# EAGLE board BreadboardPower (EAGLE 9.7.0)
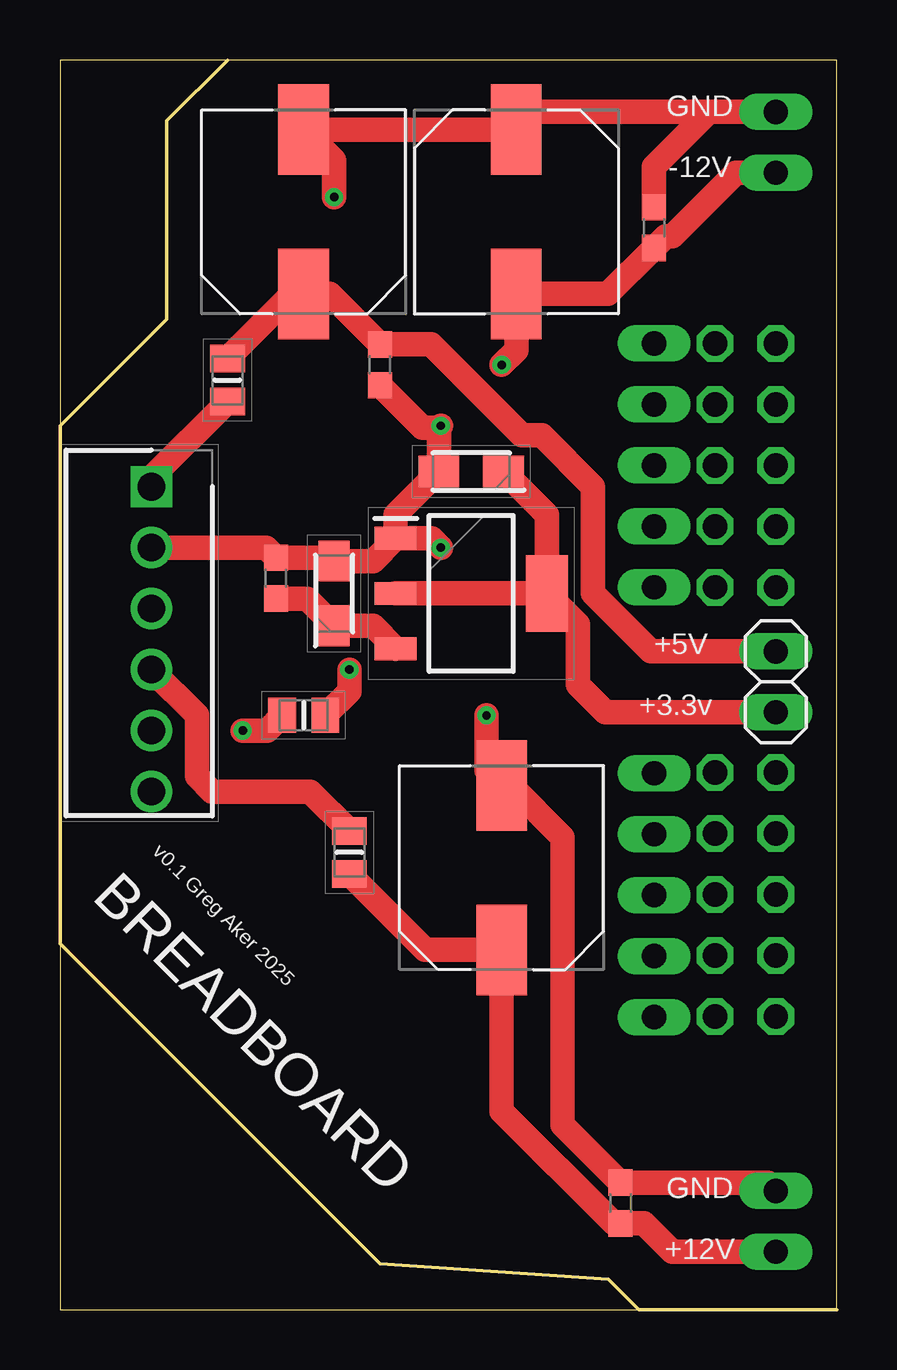
[diagram p0: board, top side]
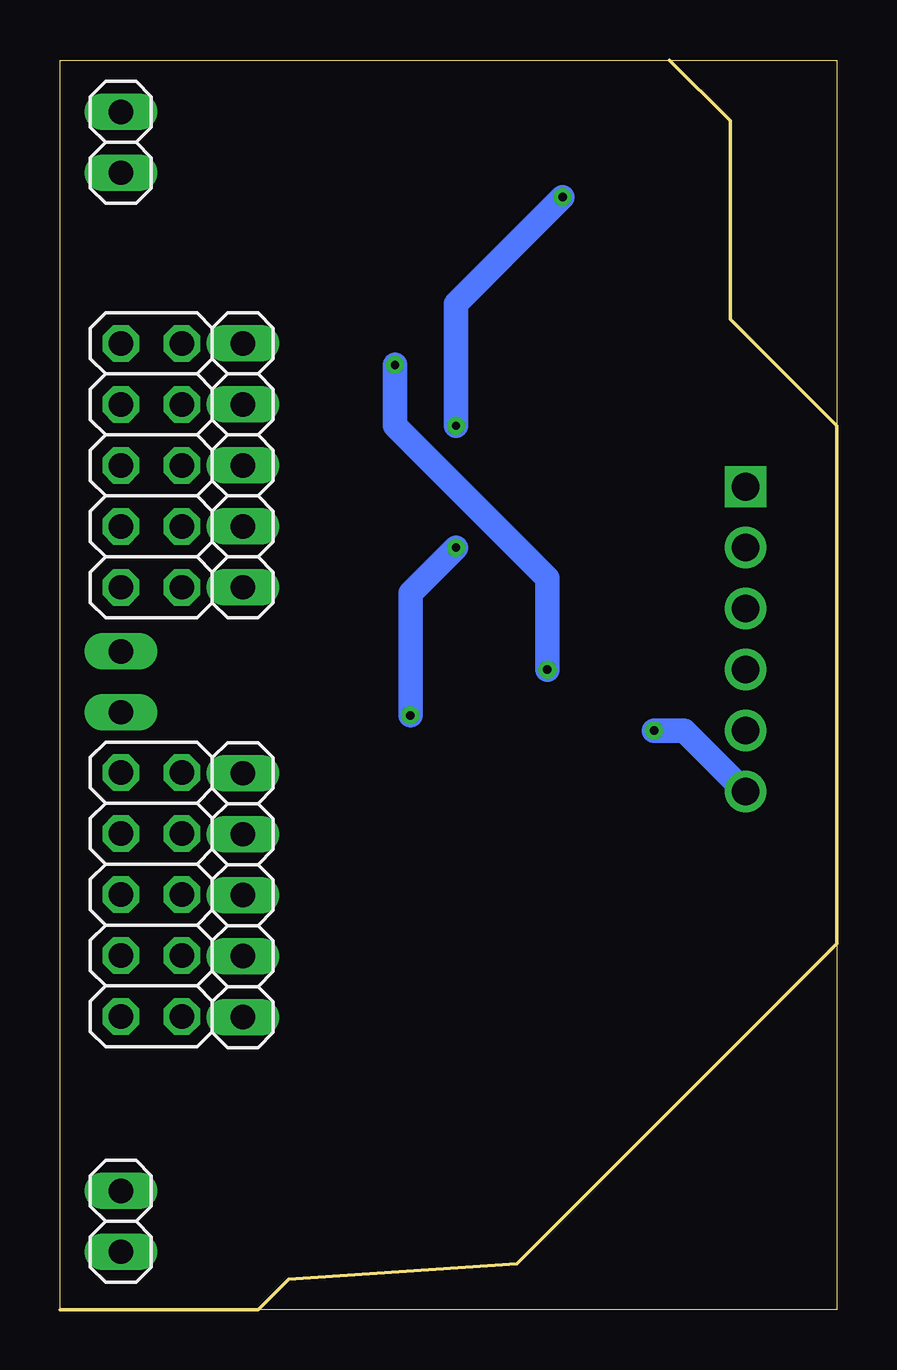
[diagram p1: board, bottom side, seen from below]

Size 32.38 x 52.07 mm. Coordinates in mm from the lower left corner, seen from the top.
Outline: 24.13,0 0,0 0,19.05
Outline: 24.13,0 32.38,0
Outline: 32.38,0 32.38,52.07 6.99,52.07
Outline: 6.99,52.07 0,52.07 0,36.83
Outline: 0,36.83 0,19.05
Outline: 6.99,52.07 4.45,49.53 4.45,45.09 4.45,41.27 0,36.83
Outline: 0,36.83 0,19.05
Outline: 0,19.05 0,15.24 13.34,1.91 22.86,1.27 24.13,0
Outline: 24.13,0 32.38,0
Copper layers (1*16): Top 0.035mm / dielectric 1.5mm / Bottom 0.035mm
Design rules "Fusion Electronics Design Rules": minimum track width 6mil, minimum drill 0.35mm, track to track 6mil, track to pad 6mil, pad to pad 6mil, via to via 6mil, smd to smd 6mil, copper to edge 40mil, drill to drill 6mil, minimum pad ring 10mil, minimum via ring 8mil, stop-mask expansion 4mil, vias tented up to drill 9999mil, thermal gap 10mil

## Footprints (pad centres in the part's own frame; a part is rotated, then mirrored left to right if it is on the bottom)
CAPAE830X1050N = smd 3.764 x 2.115: 1 -3.426,0; 2 3.426,0
0603 = smd 1.1 x 1: 1 -0.85,0; 2 0.85,0
CAPPM3216X180N = smd 1.7 x 1.3: 1 -1.35,0; 2 1.35,0
BEADC2012X105N = smd 1.15 x 1.45: 1 -0.9,0; 2 0.9,0
SOT230P700X180-4N = smd 1.75 x 0.95: 1 -3.15,2.3; 2 -3.15,0; 3 -3.15,-2.3 | smd 1.75 x 3.2: 4 3.15,0
SHDR6W66P0X254_1X6_1524X572X10 = drill 1.15 pad 1.725 square: 1 0,0 | drill 1.15 pad 1.725: 2 -2.54,0; 3 -5.08,0; 4 -7.62,0; 5 -10.16,0; 6 -12.7,0
1X02 = drill 1.016 long: 1 -1.27,0; 2 1.27,0
1X05 = drill 1.016 long: 1 -5.08,0; 2 -2.54,0; 3 0,0; 4 2.54,0; 5 5.08,0
2X05 = drill 1.016 octagon: 1 -5.08,-1.27; 2 -5.08,1.27; 3 -2.54,-1.27; 4 -2.54,1.27; 5 0,-1.27; 6 0,1.27; 7 2.54,-1.27; 8 2.54,1.27; 9 5.08,-1.27; 10 5.08,1.27

## Placement (x,y rotation side)
C1  220uf  [CAPAE830X1050N]  19.02,45.75 270 top
C2  220uf  [CAPAE830X1050N]  18.41,18.41 90 top
C3  0.1uF  [0603]  24.77,45.09 270 top
C4  0.1uF  [0603]  23.37,4.45 270 top
C5  0.1uF  [0603]  13.34,39.37 90 top
C6  220uf  [CAPAE830X1050N]  10.16,45.75 90 top
C9  TAJA106K016RNJ  [CAPPM3216X180N]  17.14,34.92 180 top
C10  TAJA106K016RNJ  [CAPPM3216X180N]  11.43,29.84 90 top
C11  0.1uF  [0603]  9.01,30.48 90 top
FB1  BLM21PG300SN1D  [BEADC2012X105N]  10.16,24.77 0 top
FB2  BLM21PG300SN1D  [BEADC2012X105N]  12.06,19.05 270 top
FB3  BLM21PG300SN1D  [BEADC2012X105N]  6.99,38.73 90 top
IC2  LM1117MPX-3.3_NOPB  [SOT230P700X180-4N]  17.14,29.84 0 top
J1  640456-6  [SHDR6W66P0X254_1X6_1524X572X10]  3.81,34.29 90 top
JP1  PINHD-1X2  [1X02]  29.84,48.64 90 bottom
JP2  PINHD-1X2  [1X02]  29.84,3.68 90 bottom
JP3  PINHD-1X5  [1X05]  24.77,35.18 270 bottom
JP4  PINHD-1X5  [1X05]  24.77,17.27 270 bottom
JP5  PINHD-1X2  [1X02]  29.84,26.16 270 top
JP6  PINHD-2X5  [2X05]  28.57,17.3 90 bottom
JP7  PINHD-2X5  [2X05]  28.57,35.18 270 bottom

## Library data of the parts
C1 C2 C6 = Tinkercad; CATEGORY: Capacitor
C3-C5 C11 = SparkFun-Capacitors; PROD_ID: CAP-08390
C9 C10 = TAJA106K016RNJ; DESCRIPTION: AVX - TAJA106K016RNJ - CAP, TANT, 10UF, 16V, CASE A; HEIGHT: 1.8mm; MANUFACTURER_NAME: Kyocera AVX; MANUFACTURER_PART_NUMBER: TAJA106K016RNJ; MOUSER_PART_NUMBER: 581-TAJA106K016R; MOUSER_PRICE-STOCK: https://www.mouser.co.uk/ProductDetail/KYOCERA-AVX/TAJA106K016RNJ?qs=OVpPYgiJXXV05Cvf2fCYWQ%3D%3D
FB1-FB3 = BLM21PG300SN1D; DESCRIPTION: 30 Ohms @ 100MHz 1 Power Line Ferrite Bead 0805 (2012 Metric) 4A 14mOhm; HEIGHT: 1.05mm; MANUFACTURER_NAME: Murata Electronics; MANUFACTURER_PART_NUMBER: BLM21PG300SN1D; MOUSER_PART_NUMBER: 81-BLM21P300S; MOUSER_PRICE-STOCK: https://www.mouser.co.uk/ProductDetail/Murata-Electronics/BLM21PG300SN1D?qs=vSIcEeo8lXttJMV%2F1g5%2F6A%3D%3D
IC2 = LM1117MPX-3.3_NOPB; DESCRIPTION: Space saving 800-mA low-dropout linear regulator with internal current limit; HEIGHT: 1.8mm; MANUFACTURER_NAME: Texas Instruments; MANUFACTURER_PART_NUMBER: LM1117MPX-3.3/NOPB; MOUSER_PART_NUMBER: 926-LM1117MPX3.3NOPB; MOUSER_PRICE-STOCK: https://www.mouser.co.uk/ProductDetail/Texas-Instruments/LM1117MPX-3.3-NOPB?qs=X1J7HmVL2ZHRbBIxXi4utg%3D%3D
J1 = 640456-6; DESCRIPTION: Body Features: Primary Product Color Natural | Configuration Features: Number of Rows 1 | Number of Columns 6 | PCB Mount Orientation Vertical | Number of Positions 6 | Contact Features: Contact Underplating Material Thickness 50 MICIN | Contact Underplating Material Thickness 1.27 MICM | Mating Square Post Dimension .64 MM | Contact Layout Inline | Contact Mating Area Length .295 INCH | Contact Mating Area Plating Material Thickness 3.81 MICM | Contact Base Material Copper Alloy | Contact Mating Area Plati; HEIGHT: 10.033mm; MANUFACTURER_NAME: TE Connectivity; MANUFACTURER_PART_NUMBER: 640456-6; MOUSER_PART_NUMBER: 571-6404566; MOUSER_PRICE-STOCK: https://www.mouser.co.uk/ProductDetail/TE-Connectivity-AMP/640456-6?qs=%2F35zJ5USjomb%252BGgX%252BBnrrQ%3D%3D
JP1 JP2 JP5 = Connector; CATEGORY: Headers; DESCRIPTION: Header-Straight-2 Position; PACKAGE_TYPE: THT; PITCH: 0.100" (2.54mm); SUBCATEGORY: Headers-Male Pins; TYPE: Board to Board or Cable-Unshrouded-Through Hole-Straight
JP3 JP4 = Connector; CATEGORY: Headers; DESCRIPTION: Header-Straight-5 Position; PACKAGE_TYPE: THT; PITCH: 0.100" (2.54mm); SUBCATEGORY: Headers-Male Pins; TYPE: Board to Board or Cable-Unshrouded-Through Hole-Straight
JP6 JP7 = Connector; CATEGORY: Headers; DESCRIPTION: Header-Straight-2x5 Position; PACKAGE_TYPE: THT; PITCH: 0.100" (2.54mm); SUBCATEGORY: Headers-Male Pins; TYPE: Board to Board or Cable-Unshrouded-Through Hole-Straight

## Nets
3.3V: C9.1 IC2.2 IC2.4 JP5.2
5V_FILTERED: C10.1 C11.1 IC2.3
+5_RAW: FB3.1 J1.1
+5V_FILTERED: C5.2 C6.1 FB3.2 JP5.1
+12V: C2.1 C4.2 FB2.2 JP2.1
-12V: C1.2 C3.2 FB1.2 JP1.1
-12VIN: FB1.1 J1.6
GND: C1.1 C2.2 C3.1 C4.1 C5.1 C6.2 C9.2 C10.2 C11.2 IC2.1 J1.2 JP1.2 JP2.2
N$1: FB2.1 J1.4

## Tracks (layer width: path | path; a pad name or v marks a point on that pad's centre or on a via)
3.3V
  Top 1.016: IC2.2 IC2.4 | C9.1 20.3,33.12 IC2.4 | IC2.4 21.59,28.55 21.59,26.04 22.73,24.89 JP5.2
5V_FILTERED
  Top 1.016: IC2.3 13.04,28.5 C10.1 10.29,29.63 C11.1
+5_RAW
  Top 1.016: J1.1 3.81,34.66 FB3.1
+5V_FILTERED
  Top 1.016: C6.1 9.67,42.32 | JP5.1 24.64,27.43 22.86,29.21 22.23,29.84 22.23,34.29 20.09,36.43 19.25,36.43 15.46,40.22 C5.2 11.23,42.32 C6.1 | FB3.2 9.67,42.32 | 9.67,42.32 C6.1
+12V
  Top 1.016: FB2.2 15.23,14.99 C2.1 18.41,8.27 23.09,3.6 C4.2 24.34,3.6 25.4,2.54 25.53,2.41 JP2.1
-12V  (via drill 0.35)
  Top 1.016: v18.41,39.37 19.02,39.98 C1.2 21.58,42.32 22.85,42.32 C3.2 25.25,44.73 25.54,44.73 28.18,47.37 JP1.1 | FB1.2 12.06,25.77 v12.06,26.67
  Bottom 1.016: v18.41,39.37 18.41,36.83 16.51,34.92 12.06,30.48 12.06,29.84 v12.06,26.67
-12VIN  (via drill 0.35)
  Top 1.016: FB1.1 8.62,24.13 v7.62,24.13
  Bottom 1.016: J1.6 6.35,24.13 v7.62,24.13
GND  (via drill 0.35)
  Top 1.016: IC2.1 13.99,33.12 C9.2 15.79,36.49 15.79,36.75 | IC2.1 13.04,31.2 C10.2 11.29,31.33 C11.2 8.59,31.75 J1.2 | 27.05,49.91 19.76,49.91 C1.1 C6.2 11.43,47.9 v11.43,46.35 | 27.05,49.91 JP1.2 | 27.47,49.91 JP1.2 | 15.79,36.75 v15.88,36.83 | C5.1 15.11,36.75 15.79,36.75 | IC2.1 15.48,32.15 v15.88,31.75 | v17.78,24.77 17.78,22.48 C2.2 18.8,21.84 20.95,19.68 20.95,17.78 20.95,11.43 20.95,7.71 C4.1 29.5,5.29 JP2.2 | 27.05,49.91 JP1.2 | C3.1 24.77,46.99 24.77,47.62 27.05,49.91
  Bottom 1.016: v11.43,46.35 15.88,41.91 v15.88,36.83 | v15.88,31.75 17.78,29.84 v17.78,24.77
N$1
  Top 1.016: J1.4 5.71,24.77 5.71,22.23 6.35,21.59 8.89,21.59 10.43,21.59 FB2.1

## Text on the board
tPlace: GND | -12V | +5V | +3.3v | v0.1 Greg Aker 2025 | BREADBOARD | GND | +12V